# Altium PCB Rackmount_DSP.PcbDoc (part 10 of 24)
Units mil, origin at the board's own origin, x right, y up, seen from the top; angles counter-clockwise.
Board outline 10629.92 x 8267.72 mil, 4 copper layers (Top Layer, Mid Layer 1, Mid Layer 2, Bottom Layer), stack 36.2 mil thick; 4500 components, 1565 nets, 9765 pads, 3289 vias.
Unrouted connection lines stored in the file: 1.
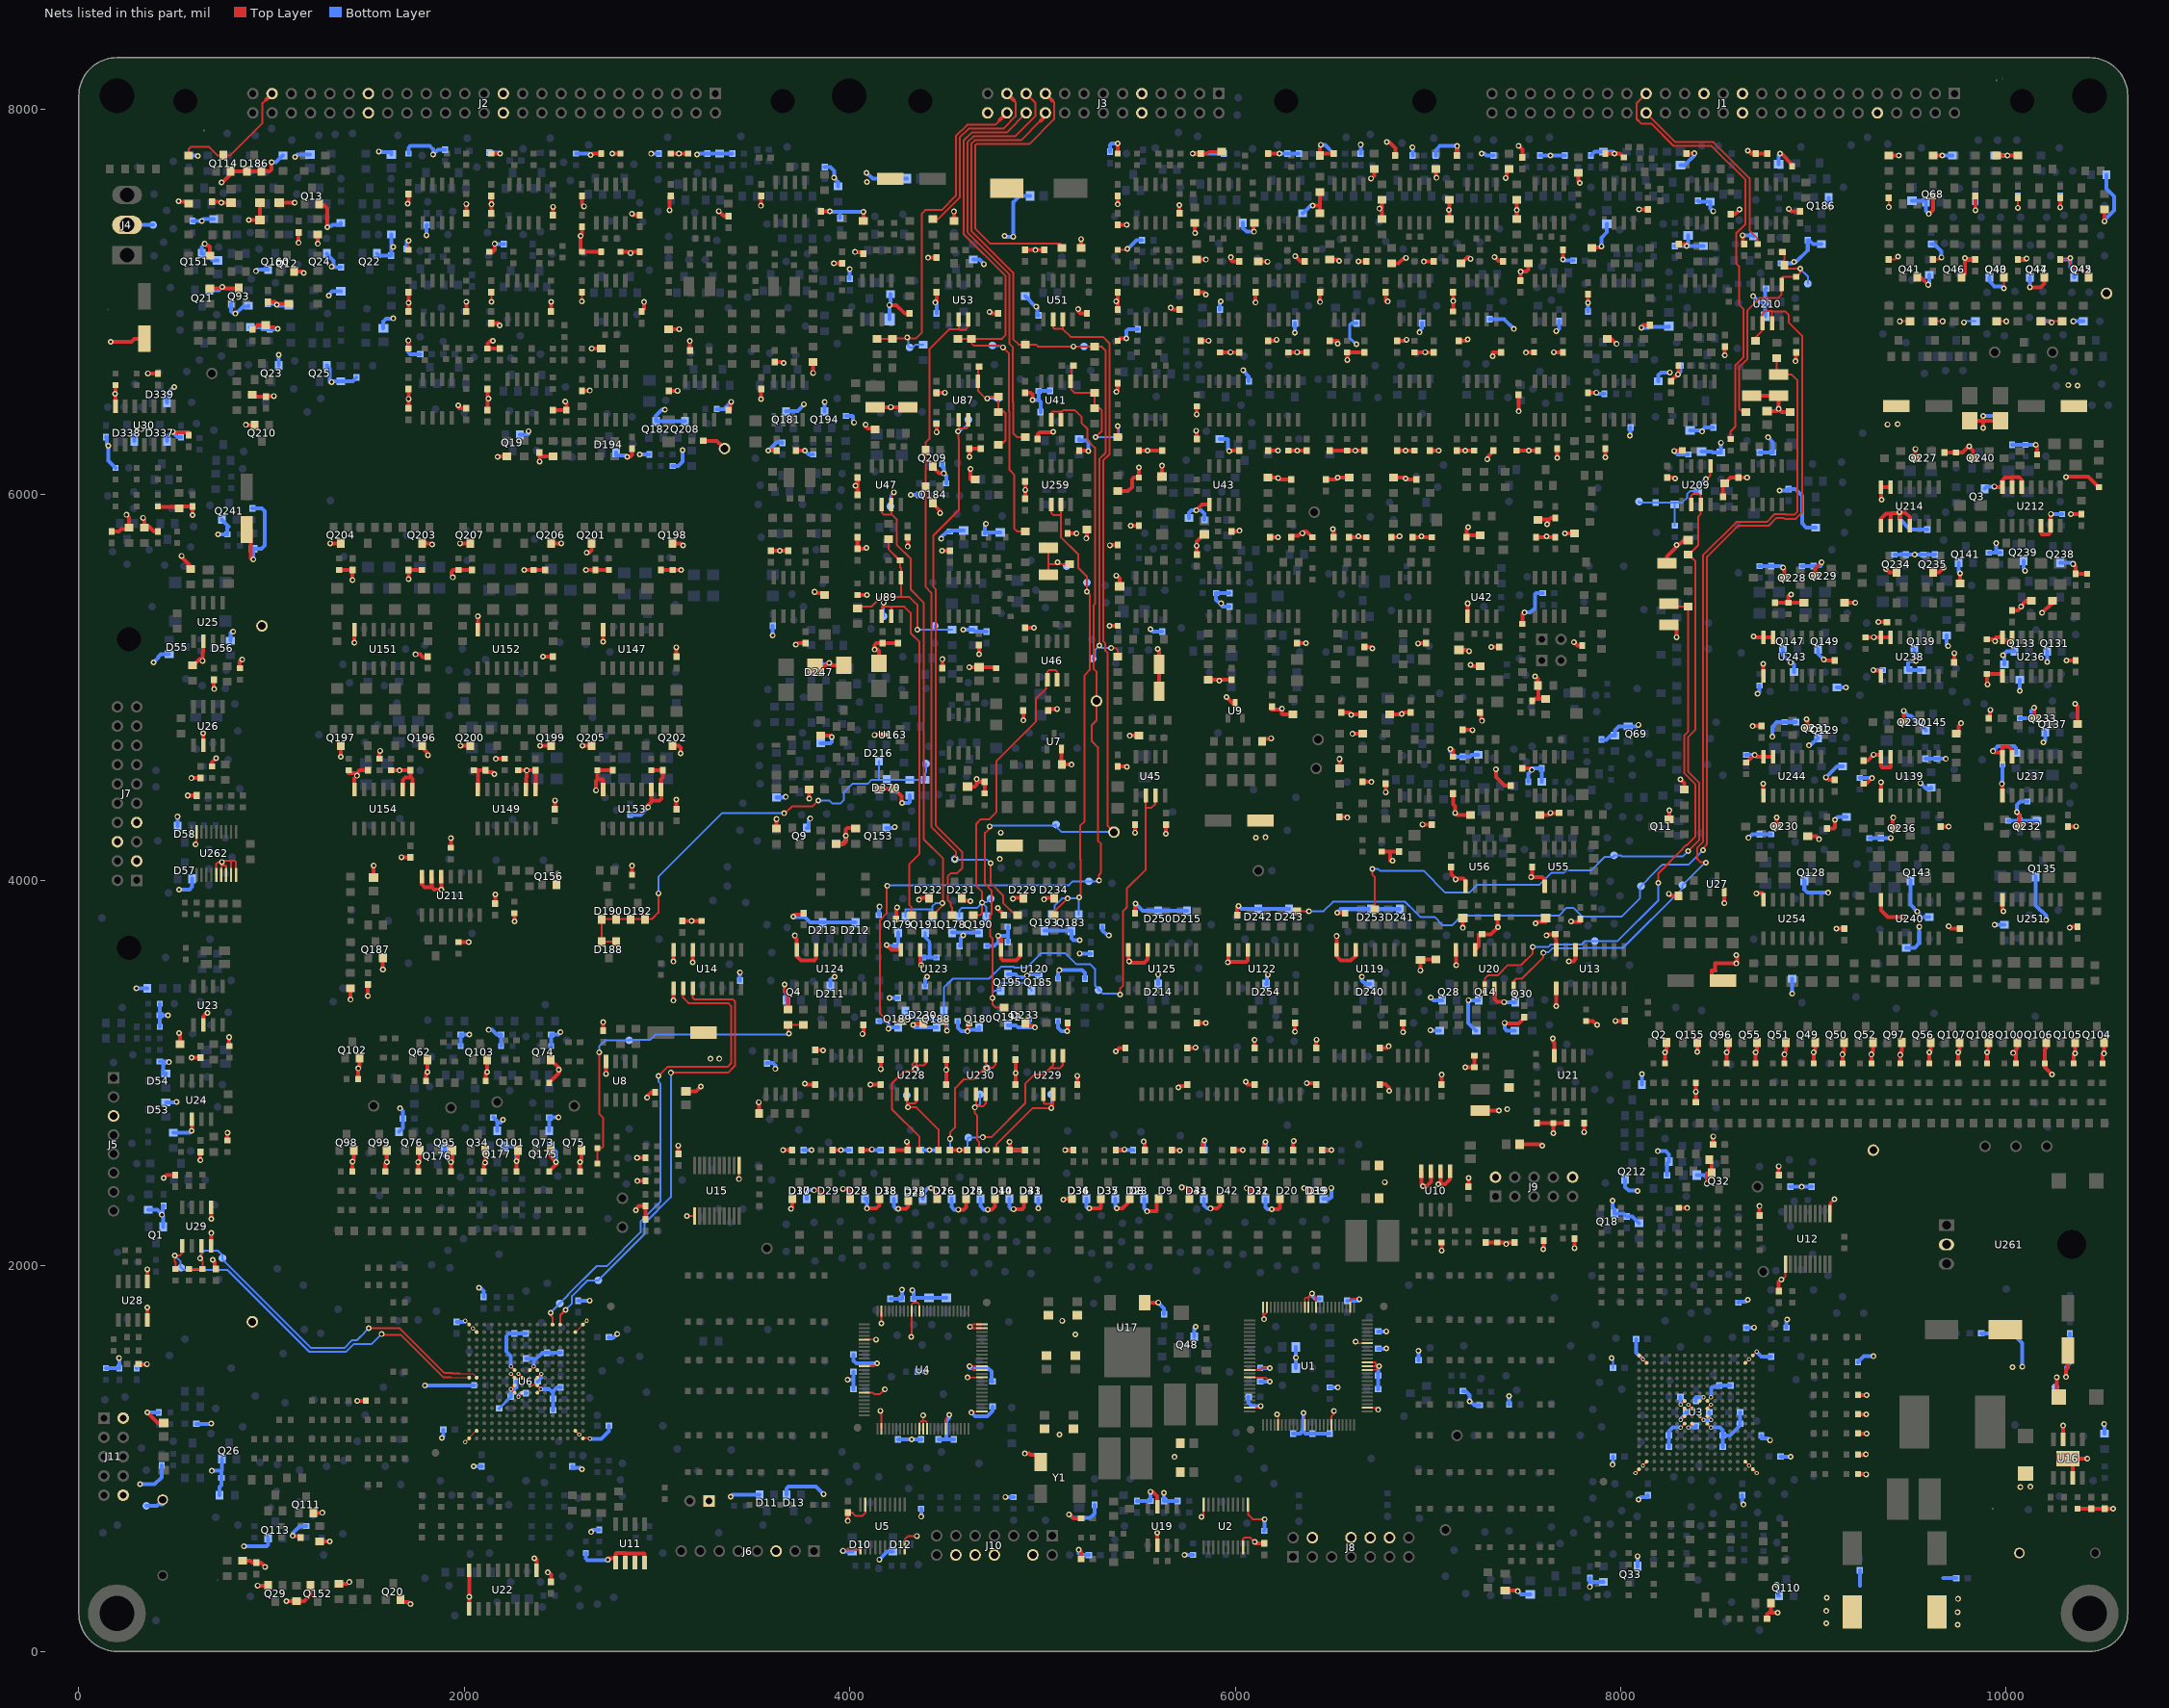
[diagram p12: the nets of this part, all layers, seen from the top]

## Via types
v1: diameter 30, hole 16, Top Layer to Bottom Layer, 3143 vias
v2: diameter 22, hole 12, Top Layer to Bottom Layer, 146 vias

## Nets (pads, with @x,y where several pads share a name; then routed paths per layer and width w, separated by ;. In a path a pad name is that pad's centre, name@x,y a point inside that pad or via, vN(x,y) a via of type N, cw(c..) or ccw(c..) an arc to the next point about the centre after c; other vN are vias at no path point) (continued)
GND: (continued)
  Bottom Layer w20: R863.2@140,1470 C360.2@210,1470 210,1521.07 v1(208.79,1522.28) ; C435.2@140,6300 146,6300 146,6261.57 v1(153.21,6254.36) 153.21,6176.79 R1493.2@190,6140 ; J4.2@250,7400 TP1675.1@385,7400 ; D338.1@287.5,6278.5 287.5,6317.61 310.71,6340.82 v1(324.1,6340.82) ; v1(298.45,3440) R2719.2@355,3440 ; C441.2@300,1470 320,1490 v1(353.36,1490) ; v1(317.24,867.09) 393.59,867.09 430,903.5 C354.2@430,965 ; TP1672.1@350,755 405,755 411.85,761.85 435,761.85 C1143.1@435,786.85 ; v1(355.17,1240) C353.2@415,1240 ; R1378.2@360,2290 406.77,2290 431.11,2265.66 v1(431.11,2264.84) ; v1(387.19,5130.05) 411.94,5154.8 411.94,5159.44 425,5172.5 D55.1@468.5,5172.5 ; C432.2@420,3060 449.28,3060 ; R870.2@420,3240 C431.2@420,3300 ; R867.2@420,3360 C431.2@420,3300 ; Q1.2@437.5,2201.5 437.5,2258.46 v1(431.11,2264.84) ; C423.1@440,2310 434,2310 434,2267.73 v1(431.11,2264.84) ; D53.1@451.5,2847.5 504.12,2847.5 v1(506.48,2849.86) ; D54.1@451.5,2997.5 438,2997.5 438,3042 449.28,3053.28 449.28,3060 ; D337.1@457.5,6278.5 457.5,6301.57 v1@483.69,6327.76 ; D339.1@457.5,6478.5 457.5,6525.22 491.24,6558.97 v1(495.09,6558.97) ; v1(463.04,3300) C431.2@420,3300 ; v1(467.34,3056.64) 463.98,3060 449.28,3060 ; v1(486.91,6328.02) 486.91,6327.76 v1@483.69,6327.76 ; R680.2@490,2690 574.71,2690 v1(584.64,2699.94) ; v1(511.57,4330.25) 512.5,4329.33 D58.1@512.5,4281.5 ; v1(519.49,3951.94) 573.66,3951.94 587.5,3965.78 D57.1@587.5,4008.5 ; C433.2@530,6300 530,6299.59 511.85,6299.59 v1@483.69,6327.76 ; C1035.1@570,7760 615.8,7760 v1(617.5,7758.3) ; C1043.1@590,7420 v1(638.44,7420) 648.44,7430 R2281.2@700,7430 ; C1028.1@610,1180 683.87,1180 v1(686.28,1182.41) ; v1(652.97,7302.55) 637.5,7287.08 Q151.2@637.5,7251.5 657.29,7251.5 693.79,7215 C1.2@720,7215 ; Q21.2@677.5,7061.5 726.19,7061.5 v1(743.76,7079.07) ; v1(688.98,936.43) 688.72,936.43 690.72,938.42 740,938.42 740,936 ; v1(722.76,5795) R2725.1@770,5795 770,5830 770.78,5830 776.64,5835.86 742.5,5870 Q241.2@742.5,5873.5 ; R1357.2@730,810 730,852.5 740,862.5 C358.1@740,900 740,936 ; Q26.2@742.5,998.5 742.68,998.32 742.68,938.68 740,936 ; D56.1@786.5,5242.5 786.5,5282.5 794,5290 v1(800.51,5290) ; C430.1@790,6990 790,6951.7 801.7,6940 810.86,6940 v1(811.63,6940) 814.3,6940 851.35,6977.06 880,6977.06 R660.1@880,6980 ; v1(856.2,544.54) 973.27,544.54 982.5,553.76 Q113.2@982.5,588.5 ; R1375.2@890,6870 941.93,6870 951.93,6860 C419.1@990,6860 1026,6860 1026.67,6860.67 v1(1031.15,6860.67) ; C1178.1@900,5930 948.73,5930 964.14,5914.59 964.14,5736.75 947.39,5720 R2732.1@905,5720 905,5665.31 v1(905.6,5664.72) ; v1(918.59,7160.08) 918.59,7160.73 926.36,7168.5 Q160.2@982.5,7168.5 ; C1101.1@980,6990 1016,6990 1019.6,6986.4 v1(1026.22,6986.4) 1032.62,6980 R2506.1@1090,6980 ; v1(1000.21,7724.96) 1022.46,7724.96 1057.5,7760 R2504.1@1060,7760 ; Q23.2@1037.5,6671.5 v1(1037.5,6726.7) ; v1(1108.88,599.32) 1108.88,611.46 1147.42,650 R2099.1@1180,650 ; v1(1121.1,7752.76) 1133.34,7765 C821.2@1200,7765 ; Q25.2@1287.5,6671.5 1287.5,6668 1300.73,6654.77 1300.73,6585.24 v1(1312.25,6585.24) 1317.01,6590 R1377.2@1360,6590 1421.5,6590 1440,6608.5 C421.1@1440,6610 ; Q24.2@1287.5,7251.5 1287.5,7248 1321.64,7213.86 1321.64,7194.07 v1(1310.65,7183.08) 1313.74,7180 C420.1@1360,7180 ; v1(1288.76,7387.58) 1296.18,7395 1312.5,7395 1317.5,7400 1360,7400 R1376.2@1360,7410 ; v1(1296.56,7034.14) 1296.56,7036.56 1315,7055 C820.2@1360,7055 ; Q22.2@1547.5,7251.5 1559,7240 C418.1@1620,7240 v1@1620,7285.9 ; v1(1555.95,7781.25) 1571.25,7781.25 1575,7777.5 1620,7777.5 C819.2@1620,7765 ; C822.2@1580,6865 1580,6899.57 1594.09,6913.66 1630.88,6913.66 v1(1630.88,6914.99) ; R1374.2@1620,7350 v1@1620,7285.9 ; v1(1630.88,7285.9) v1@1620,7285.9 ; R2556.2@1660,2695 1680,2715 C1117.1@1680,2765 1680,2803.57 v1(1666.56,2817.01) ; C1212.2@1700,7275 1701,7275 1701,7318.69 v1(1711.84,7318.69) ; v1(1709.47,6800.28) 1709.24,6800.28 1709.24,6740.41 1719.66,6730 C1209.2@1770,6730 ; R824.2@1710,7770 1710,7799.25 1719.87,7809.11 1822.02,7809.11 1837.27,7793.86 v1(1837.27,7764.71) 1862.57,7790 C1215.2@1900,7790 ; v1(1795.01,1380) R874.2@2050,1380 ; v1(1802.8,7346.68) 1802.8,7397.8 C367.1@1805,7400 ; v1(1884.11,1107.83) 1890,1113.71 C285.2@1890,1150 ; Q176.2@1897.5,2611.5 1897.5,2570.91 v1(1930,2538.41) ; C287.2@1960,1710 2000.08,1710 v2(2005.04,1714.96) ; R2610.2@1980,3140 C1140.2@1980,3200 v1(2025.56,3200) ; v1(2048.57,960) C269.2@2090,960 ; v1(2076.11,1886.21) 2076.11,1885.64 2084.12,1885.64 2084.12,1883.67 2085.95,1883.67 2100,1869.62 C274.2@2100,1840 ; v1(2126.73,3223.96) 2143.35,3223.96 2167.3,3200 C1141.2@2190,3200 R2611.2@2190,3140 ; C1236.2@2130,7775 2180,7775 v1(2185,7770) ; C1118.1@2150,2770 2170,2750 2170,2743.72 ; v1(2157.29,7302.5) 2159.79,7300 C1233.2@2205,7300 ; R2557.2@2170,2700 2170,2743.72 ; v1(2201.32,2757.46) 2187.58,2743.72 2170,2743.72 ; Q177.2@2207.5,2621.5 2255.49,2621.5 2270,2606.99 v1(2270,2542.61) ; C279.2@2240,1320 2240,1359.37 v2(2241.26,1360.63) 2260.07,1360.63 2270,1370.56 C266.2@2270,1400 ; v2(2241.26,1478.74) 2241.26,1531.47 2216.9,1555.83 2216.9,1635.31 2233.27,1651.68 2234.94,1650 C271.2@2260,1650 C273.2@2320,1650 ; v2(2280.63,1321.26) 2280.63,1328.01 2292.62,1340 C244.2@2320,1340 ; Q19.2@2287.5,6311.5 2327.5,6311.5 2332.82,6316.82 v1(2332.82,6330.31) ; C270.2@2320,1520 2356,1520 2360.22,1515.78 ; v2(2360.22,1478.4) 2360.22,1515.78 ; C245.2@2380,1400 2398.74,1418.74 v2(2398.74,1439.37) ; v2(2397.55,1360.63) 2439.98,1360.63 2460,1340.61 ; R2555.2@2440,2700 C1116.1@2440,2770 v1(2488.61,2770) ; Q175.2@2447.5,2621.5 2474.9,2594.1 v1(2474.9,2538.58) ; R2609.2@2450,3140 C1139.2@2450,3200 2486.73,3200 v1(2499,3212.27) ; C239.2@2460,1250 C280.2@2460,1310 2460,1340.61 ; C250.2@2500,1370 2480.6,1370 2460,1349.4 2460,1340.61 ; C307.2@2500,1550 C306.2@2430,1550 2404.73,1550 2370.51,1515.78 2360.22,1515.78 ; C268.2@2560,960 2560,952.5 2602.86,952.5 v1(2610.87,944.49) ; R2340.2@2580,7770 2648.33,7770 v1(2655.35,7762.98) ; C286.2@2590,1820 v1(2650.74,1820) ; R751.2@2630,510 2630,481.84 2637.85,473.99 2744.28,473.99 v1(2744.28,474.88) ; v2(2652.36,1104.23) 2652.36,1102.81 2710.43,1102.81 2750,1142.39 C284.2@2750,1170 ; v1(2658.41,618.96) 2658.41,624.4 2664,630 C243.2@2700,630 ; C293.2@2750,1630 2750,1627.49 2773.1,1627.49 2791.52,1645.92 v1(2793.53,1645.92) ; D194.1@2787.5,6218.5 2787.5,6205 2836.39,6205 v1(2844.37,6197.02) ; R2645.2@2860,4340 2913.98,4340 v1(2953.2,4379.22) ; v1(2910.18,6210) C1150.1@2960,6210 ; v1(2968.98,7769.14) 2968.98,7770 C368.1@3010,7770 ; v1(3040.96,6442.26) 3024.75,6442.26 2992.85,6410.35 2995,6408.2 Q182.3@2995,6381.5 Q208.3@3145,6381.5 ; R2623.1@3080,6150 3110.4,6150 3132.24,6171.84 v1(3132.24,6231.31) ; v1(3207.34,7765.35) 3212,7770 C362.1@3260,7770 R1672.2@3325,7770 C1248.2@3390,7770 ; R2584.2@3310,6445 3346.89,6445 v1(3384.78,6482.9) ; v1(3382.61,801.86) 3392.25,811.5 D11.1@3532.5,811.5 ; C633.2@3430,3480 3430,3521.91 v1(3430.61,3522.53) ; C631.2@3570,3050 3570,3052.07 3599.89,3052.07 3613.01,3038.95 v1(3613.01,3021.5) ; v1(3576.97,6230) 3618.91,6271.94 3650,6271.94 C1148.1@3650,6270 ; v1(3600,5270.97) C422.1@3600,5320 ; R1101.2@3620,4430 3666.68,4430 3668.59,4431.91 v1(3667.71,4432.78) ; v1(3661.87,3460.26) 3661.87,3423.2 3669.37,3415.7 3669.37,3402.41 3671.53,3400.25 3671.53,3383.48 3672.5,3383.48 Q4.2@3672.5,3378.5 ; Q181.3@3670,6431.5 3670,6434.25 3729.63,6434.25 3761.77,6466.39 v1(3761.77,6470) ; D13.1@3672.5,811.5 3672.5,844.81 3682.69,855 3824.53,855 v1(3863.58,815.95) ; v1(3706.5,3811.4) 3709.59,3808.31 3766.79,3808.31 3793.59,3781.5 D213.3@3860,3781.5 D212.3@4030,3781.5 ; C313.2@3760,2600 v1(3801.21,2600) ; v1(3766.09,6230) 3786.09,6210 R2622.1@3810,6210 ; D17.1@3777.5,2348.5 3777.5,2380.75 3789.14,2392.39 v1(3815.09,2392.39) ; Q9.2@3777.5,4271.5 3787.5,4271.5 3787.5,4315.18 3792.56,4320.24 v1(3795,4320.24) ; D247.3@3840,5121.5 3880,5121.5 3886.79,5128.29 v1(3892.89,5128.29) ; R1840.2@3850,4710 3897.93,4710 3906.47,4718.53 v1(3906.47,4743.52) ; Q194.3@3870,6431.5 v1(3870,6481.77) ; C546.1@3870,7700 3898.74,7700 3917.86,7680.87 v1(3917.86,7646.08) 3940,7623.94 R1614.1@3940,7600 ; v1(3896.68,7470) 3896.68,7468.66 3896.98,7468.36 3950,7468.36 ; D211.3@3900,3451.5 3900.11,3451.5 3900.11,3484.14 3916.27,3500.3 v1(3921.34,3500.3) ; R2415.2@3930,4190 3930,4188.48 3962.21,4188.48 3979.68,4205.94 v1(3979.68,4230.89) ; C1245.2@3950,7435 3950,7468.36 ; v1(3953.87,2600) C317.2@4000,2600 ; v1(3964.83,521.14) 3964.83,526.84 3958.87,520.88 3962.24,517.5 D10.1@4013.5,517.5 ; R2590.2@3980,6410 4012.58,6410 4016.5,6406.08 4016.5,6380.86 v1(4022.28,6375.08) ; v1(3987.95,1409.55) 4020,1409.55 ; C545.1@4000,7120 v1(4000,7170.69) ; C255.2@4020,1360 4020,1409.55 ; C225.2@4020,1450 4020,1409.55 ; C249.2@4020,1540 4020,1507.83 4033.34,1494.5 v1(4140.75,1494.5) ; v1(4070,7467.71) 4070,7468.36 3950,7468.36 ; D27.1@4077.5,2348.5 4087.5,2348.5 4087.5,2305 4089.05,2303.45 v1(4089.05,2297.53) ; v1(4086.58,7670.97) 4117.55,7640 C730.1@4295,7640 ; v1(4114.44,2603.91) 4118.35,2600 C319.2@4160,2600 ; R2585.2@4150,3270 4185.95,3270 4199.93,3256.03 v1(4199.93,3230.64) 4207.79,3238.5 Q189.3@4250,3238.5 ; R2629.1@4150,3820 4150,3855 4150.88,3855.88 4150.88,3859.45 v1(4154.54,3863.11) ; v1(4152.57,476.43) 4151.59,476.43 4152.8,476.43 4152.8,476.48 4193.81,517.5 D12.1@4223.5,517.5 ; Q153.2@4187.5,4271.5 4227.46,4271.5 v1(4232.52,4276.55) ; v1(4191,3664.61) 4195.61,3660 C1151.1@4240,3660 4250,3670 Q179.3@4250,3728.5 ; R1697.1@4205,6910 v1(4205,6984.82) 4210,6989.82 R1613.1@4210,7040 ; v1(4206.45,3390) C1156.1@4250,3390 ; C29.2@4210,1830 C37.2@4270,1830 v1(4270,1876.02) ; D38.1@4227.5,2348.5 4227.5,2307.34 4238.78,2296.07 v1(4251.13,2296.07) ; C267.2@4250,1100 4320.01,1100 v1(4320.39,1100.38) 4333.62,1100.38 4334,1100 C248.2@4370,1100 ; v1(4271.2,4400.63) 4305.42,4400.63 4310,4405.2 R2323.2@4310,4440 ; v1(4315.77,6000) C1152.1@4360,6000 ; v1(4324.63,1873.74) 4330,1868.37 R626.2@4330,1830 4335,1835 C340.2@4410,1835 C339.2@4500,1835 ; v1(4328.14,3249.92) 4339.56,3238.5 Q188.3@4450,3238.5 ; R782.1@4350,1450 v1(4396.32,1450) ; v1(4370,699.14) R628.2@4370,740 ; C759.2@4370,2600 v1(4412.94,2600) C321.1@4460,2600 ; D22.1@4377.5,2348.5 4377.5,2374.27 4406.97,2403.75 v1(4421.44,2403.75) ; R2587.2@4380,3600 R2628.1@4450,3600 ; R2627.1@4390,3450 4390,3489.43 v1(4400.77,3500.2) ; v1(4442.78,6997.53) 4450,6990.31 C1061.1@4450,6940 ; v1(4450,6325.48) C1054.1@4450,6370 ; C1057.1@4450,6530 v1(4492.83,6530) ; C253.2@4460,1100 4496,1100 4499.83,1103.83 ; v1(4474.44,5772.64) 4474.44,5779.64 4504.8,5810 R1775.2@4520,5810 4525,5815 C810.2@4590,5815 ; R2583.2@4480,6160 4480,6145 4487.31,6137.69 v1(4487.31,6111.02) 4500,6098.33 R2626.1@4500,6060 ; v1(4516.43,1227.08) 4516.43,1210.78 4499.83,1194.18 4499.83,1103.83 ; D26.1@4527.5,2348.5 4527.5,2305.95 4541.41,2292.04 v1(4562.45,2292.04) ; Q178.3@4530,3728.5 4574.32,3728.5 v1(4587.9,3714.92) ; C28.2@4540,1100 4504,1100 4500.17,1103.83 4499.83,1103.83 ; R2621.1@4560,3270 4560,3234.63 4577.93,3216.7 v1(4610.23,3216.7) 4618.54,3225 4670,3225 Q180.3@4670,3238.5 ; C1155.1@4570,3660 4576,3660 4576,3703.01 v1(4587.9,3714.92) ; v1(4588.02,5300) R1696.1@4640,5300 4650,5290 C511.2@4710,5290 ; v1(4621.66,1479.63) 4621.66,1470 4715.08,1470 4734.48,1450.61 4734.48,1400 C36.2@4740,1400 ; v1(4630.48,1238.29) 4631.42,1238.29 4649.44,1220.28 4713.67,1220.28 4740,1246.61 C27.2@4740,1270 ; R2598.2@4640,7220 4640,7221.17 4672.11,7221.17 v1(4696.32,7196.96) ; C328.1@4670,2600 4710.1,2600 v1(4711.81,2601.71) ; Q190.3@4670,3728.5 4587.9,3728.5 v1(4587.9,3714.92) ; D15.1@4677.5,2348.5 4677.5,2310.72 4696.18,2292.04 v1(4715.55,2292.04) ; v1(4706.32,5850.18) 4700,5843.86 R1778.2@4700,5800 4705,5805 C807.2@4780,5805 ; R2586.2@4710,3660 4748.94,3660 4769.6,3680.66 v1(4769.6,3711.63) 4815.88,3711.63 4820,3715.75 ; v1(4802.52,7342.91) 4805.95,7339.48 v1(4848.1,7339.48) 4848.1,7516.89 4881.21,7550 C727.2@4935,7550 ; v1(4807.11,800.72) 4813.28,800.72 4814,800 R717.2@4850,800 ; Q192.3@4820,3248.5 4860.4,3248.5 4872.4,3236.5 4932.59,3236.5 ; Q195.3@4820,3511.5 4860,3511.5 4873.63,3497.87 4911.27,3497.87 v1(4919.55,3506.15) 4924.9,3511.5 Q185.3@4980,3511.5 ; C1149.1@4820,3680 4820,3715.75 ; R2589.2@4820,3760 4820,3715.75 ; D40.1@4827.5,2348.5 4827.5,2305 4837.9,2294.6 v1(4849.6,2294.6) ; v1(4829.18,2643.29) 4830,2642.47 C324.1@4830,2600 C219.2@4910,2600 ; R2601.2@4910,7030 4963.48,6976.52 v1(4966.7,6976.52) 4974,6969.22 4974,6930 C1060.1@4980,6930 ; R2588.2@4930,3280 4930,3239.1 4932.59,3236.5 ; v1(4947.76,6492.24) 4980,6492.24 ; v1(4960.48,3236.5) 4932.59,3236.5 ; v1(4977.5,2299) D33.1@4977.5,2348.5 ; C384.1@4990,6430 4990,6482.24 4980,6492.24 ; Q193.3@5010,3738.5 Q183.3@5150,3738.5 5150,3700.58 5160.68,3689.91 v1(5192.53,3689.91) ; C1058.1@5040,6540 R2375.1@4980,6540 4980,6492.24 ; R2591.2@5080,3270 5080,3234.06 5096.87,3217.18 v1(5128.33,3217.18) ; R2624.1@5080,3490 5080,3526.79 v1(5086.94,3533.73) 5205.25,3533.73 5220,3518.98 C1153.1@5220,3490 ; v1(5116.53,2600) C1074.2@5160,2600 ; v1(5136.5,710.5) 5137.99,710.5 5157.15,691.33 5245.75,691.33 5269.62,715.21 5269.62,759.62 C312.2@5270,760 ; v1(5188.22,526.73) 5188.22,508.28 5196.51,500 C514.2@5240,500 ; R2597.2@5190,6290 5190,6282.48 5229.68,6282.48 5237.94,6274.22 5237.94,6226.85 v1(5237.5,6226.85) ; v1(5192.53,3620.67) 5192.53,3620 C1154.1@5250,3620 ; D34.1@5227.5,2348.5 5227.5,2305 5234.39,2298.11 v1(5242.89,2298.11) ; R2625.1@5310,3760 5310,3740.3 5336.38,3713.92 v1(5344.17,3713.92) ; C1200.2@5350,7780 5350,7813.26 5348.77,7814.49 5356.79,7822.52 v1(5390,7822.52) ; D35.1@5377.5,2348.5 5377.5,2305 5384.2,2298.3 v1(5385.54,2298.3) ; C4.2@5380,2600 5421.38,2600 v1(5425.29,2603.91) 5429.2,2600 C5.2@5470,2600 ; v1(5434.13,6810.96) 5435.25,6812.08 5435.25,6851.31 5443.93,6860 C1206.2@5495,6860 ; v1(5439.31,7275.29) 5442.72,7275.29 5487.44,7320 C1203.2@5515,7320 ; v1(5481.6,3878.62) 5518.72,3841.5 D250.3@5600,3841.5 D215.3@5750,3841.5 ; C325.1@5490,780 R760.2@5560,780 v1(5560,828.2) ; D8.1@5527.5,2348.5 5527.5,2297.71 v1(5542.67,2282.55) ; v1(5559.12,5303.38) 5572.5,5290 C968.2@5620,5290 ; v1(5599.51,3511.33) 5600,3510.83 D214.3@5600,3461.5 ; v1(5600.67,1810.1) 5600.67,1808.75 5630,1779.42 C297.2@5630,1750 ; v1(5630,822.53) C498.2@5630,780 C329.1@5700,780 ; v1(5736.07,500) R20.2@5780,500 ; R1679.1@5760,5880 5760,5908.37 5771.62,5920 v1(5798.13,5920) 5821.66,5920 5840,5901.66 C791.2@5840,5870 ; v1@5778.66,7770 C1099.1@5820,7770 5839.42,7770 5839.42,7770.17 5906.4,7770.17 5906.57,7770 C1093.1@5940,7770 ; Q48.2@5787.5,1631.5 5787.5,1676.67 v1(5794.87,1684.04) ; D31.1@5837.5,2348.5 5837.5,2314.38 5854.68,2297.2 v1(5870.84,2297.2) ; C1077.1@5840,2600 v1(5840,2650.43) ; R1474.2@5920,6290 5957.66,6290 5961.47,6286.19 5961.47,6239.31 5962.5,6238.28 5962.5,6232.64 v1(5968.46,6226.68) ; C1073.2@5920,6960 5920,7000.96 5922.31,7003.27 v1(5924.26,7003.27) ; C651.2@5970,5420 5934,5420 5925.91,5428.09 v1(5925.91,5436.52) 5918.48,5436.52 5900,5455 R2287.2@5900,5490 C548.2@5970,5490 ; v1(6017.06,3866.24) 6031.8,3851.5 D242.3@6120,3851.5 D243.3@6280,3851.5 ; R2602.2@6040,7410 6040,7383.59 6058.91,7364.69 v1(6097.61,7364.69) ; v1(6040.93,6645.93) 6040.93,6643.27 6070,6614.2 C1067.2@6070,6590 ; C23.2@6070,1320 6067.43,1320 6067.43,1291.83 6086.46,1272.79 v1(6130.94,1272.79) ; C34.2@6130,1400 v1(6178.83,1400) ; R17.2@6130,1470 v1(6179.34,1470) ; R25.2@6150,625 6152.71,627.71 v1(6152.71,684.99) ; v1(6155.94,2643.45) 6160,2639.38 C11.1@6160,2600 ; D32.1@6157.5,2348.5 6157.5,2303.51 6167.84,2293.17 v1(6188.77,2293.17) ; D254.3@6160,3461.5 6164.3,3461.5 6164.3,3505 v1(6169.66,3510.36) ; v1(6228.95,7770) C1098.1@6270,7770 C1092.1@6330,7770 ; C33.2@6300,1130 6336,1130 6347.53,1141.53 6352.47,1141.53 ; v1(6308.55,6842.03) 6308.55,6837.14 6312.73,6841.32 6310,6844.05 C1072.2@6310,6890 ; C21.2@6315,1470 v1(6315,1524.22) C20.2@6315,1580 ; R2595.2@6350,7460 6352.5,7460 6392.5,7500 v1(6401.53,7500) ; v1(6353.99,1236.55) 6353.99,1141.53 6352.47,1141.53 ; v1(6397.65,1856.98) 6397.65,1845.03 6413.43,1829.25 6440,1829.25 C35.2@6440,1830 ; v1(6443.78,7816.13) 6465.37,7816.13 6510,7771.5 C1097.1@6510,7770 ; C1076.1@6450,2600 v1(6498.79,2600) ; D39.1@6457.5,2348.5 6489.79,2348.5 6497.9,2356.6 v1(6497.9,2404.51) ; C32.2@6490,1130 C22.2@6400,1130 6364,1130 6352.47,1141.53 ; R605.2@6490,1370 v1(6531.99,1370) ; v1(6528.21,3832.43) 6546.37,3850.59 D253.3@6704.31,3850.59 D241.3@6854.31,3850.59 ; C25.2@6580,1820 6636.54,1820 6643.79,1827.25 v1(6644.25,1827.25) ; C1091.1@6650,7770 v1(6650,7816.78) ; v1(6657.09,3500.2) 6657.09,3480.44 6676.03,3461.5 D240.3@6700,3461.5 ; C220.2@6740,1360 C31.2@6740,1430 6740,1474.21 v1(6745.74,1479.95) ; C30.2@6740,1570 6777.5,1570 6779.43,1571.93 v1(6784.2,1571.93) ; C24.2@6740,1660 v1(6784.2,1660) ; v1(6919.32,7802.5) 6920,7801.82 C1096.1@6920,7760 ; C507.2@6950,1510 v1(6950,1558.86) ; v1(6956.2,6842.7) 6956.2,6850.56 6968.84,6863.21 6968.84,6890 C1070.2@6970,6890 ; v1(7012.25,3223.18) 7015.44,3220 R1692.2@7060,3220 ; v1(7014.17,3392.93) 7028.59,3378.5 Q28.2@7072.5,3378.5 ; C1090.1@7040,7760 7040,7788.2 7060.91,7809.11 v1(7150,7809.11) C1095.1@7150,7760 ; v1(7115.9,4681.54) 7115.9,4668.1 7144,4640 C793.2@7180,4640 7216,4640 7217.5,4641.5 7217.5,4641.69 7225.81,4650 R1681.1@7260,4650 ; C513.2@7180,1350 7195.84,1350 7215.78,1330.06 v1(7215.78,1297) 7217.96,1299.18 7240.14,1277 C516.2@7268.57,1277 ; R1690.2@7250,3220 7247.5,3220 7207.13,3260.37 7207.13,3340.82 7207.7,3340.82 7207.7,3378.5 v1(7209.53,3378.5) Q14.2@7262.5,3378.5 ; v1(7278.49,7770.9) 7293.1,7770.9 7304,7760 C1089.1@7340,7760 ; C1069.2@7320,6910 7395.15,6910 v1(7445.05,6860.11) ; v1(7394.12,3368.5) Q30.2@7452.5,3368.5 ; v1(7396.9,3260.85) 7396.9,3231.41 7408.31,3220 R1691.2@7450,3220 ; R876.2@7420,1280 v1(7420,1324.26) ; v1(7465.24,312.14) 7482.38,295 C818.2@7530,295 ; v1(7500,5389.34) 7530.64,5389.34 7553.99,5412.7 7553.99,5484.32 7559.67,5490 C1051.2@7595,5490 ; C541.1@7520,4510 7520,4553.96 v1(7538.49,4572.45) 7546.04,4580 C1050.2@7590,4580 R1635.1@7590,4510 ; C1094.1@7580,7760 v1(7635.82,7760) C1088.1@7710,7760 ; v1(7665,6850) 7667.5,6850 7680,6862.5 C1068.2@7680,6900 ; v1(7700,7220.35) 7705.35,7215 C1239.2@7755,7215 ; C375.1@7830,6950 v1(7830,6995.46) ; v1(7839,334.48) 7839,339 v1@7840,340 ; C415.1@7840,380 v1@7840,340 ; C1221.2@7845,7760 7865,7780 R2559.2@7910,7780 7956.6,7780 v1(7966.6,7770) ; v1(7873.44,6530) 7878.44,6525 C1242.2@7915,6525 ; v1(7899.41,7289.44) 7899.41,7333.41 7928.5,7362.5 C787.2@7928.5,7405 ; C436.1@7900,4730 7900,4727.88 7925.5,4727.88 7947.61,4750 R1354.1@7970,4750 7970,4778.09 7989.41,4797.5 Q69.2@8038.5,4797.5 8082,4797.5 8091.07,4806.57 v1(8091.07,4807.09) ; R1371.2@7910,360 7860,360 v1@7840,340 ; v1(7957.61,968.97) 7960,968.97 C238.2@7960,1010 ; v1(7957.6,2338.71) 7957.6,2304.59 7956.97,2303.97 7967.5,2293.44 Q18.2@7967.5,2271.5 8013.5,2271.5 C374.1@8030,2255 8060,2255 R1358.1@8095,2220 ; Q212.2@8022.5,2448.5 8022.5,2409.01 8041.39,2390.12 8086.66,2390.12 v1(8086.66,2388.47) ; v1(8047.3,6307.44) 8050,6310.15 C660.2@8050,6350 ; C261.2@8080,1620 8080,1550 v2(8114.41,1515.59) ; Q33.2@8087.5,441.5 v1(8087.5,493.57) ; v1(8092,788.06) 8104,800.05 8140,800.05 C265.2@8140,810 ; v1(8107.74,6867.37) 8142.74,6867.37 8148.75,6873.38 8148.75,6870.61 8250,6870.61 C785.2@8250,6875 ; R74.1@8110,2940 v1(8110,2995.84) ; v1(8192,2594.42) 8234.61,2594.42 8250,2579.03 R71.1@8250,2540 8240,2530 C1159.1@8240,2470 ; R2558.2@8195,6590 8195,6620.96 8209.24,6635.2 v1(8253.88,6635.2) ; C231.2@8250,1060 C257.2@8250,1120 8250,1142.27 8268.99,1161.26 v2(8311.26,1161.26) ; v1(8277.18,6227.91) 8295.09,6210 R2230.1@8350,6210 ; C1227.2@8280,7290 8340.93,7290 v1(8342.5,7291.57) ; v1(8297.05,6625) 8310,6637.95 C1218.2@8310,6670 ; C281.2@8310,1320 8310,1281.82 v2(8311.26,1280.56) ; C1176.2@8310,7710 8330.64,7710 8381.17,7760.52 v1(8381.17,7771.82) ; v2(8311.26,1200.63) 8311.26,1206.96 8340,1235.7 C256.2@8340,1240 ; C784.2@8350,7345 8350,7299.07 v1(8342.5,7291.57) ; v2(8350.63,1161.26) 8351.87,1162.5 8390,1162.5 C263.2@8390,1170 ; C786.2@8360,6335 8415.67,6335 v1(8422.19,6328.48) 8422.19,6334.87 8437.32,6350 C674.2@8480,6350 ; C259.2@8390,1300 8390,1318.74 v2(8429.37,1318.74) ; C817.2@8395,2470 8432.02,2470 8445.63,2456.4 v1(8445.63,2426.87) ; C1224.2@8400,7525 8405,7520 R1315.2@8465,7520 8465,7486.72 v1(8480.12,7471.6) ; C801.2@8420,6225 8472.5,6225 8477.5,6220 R1686.1@8520,6220 v1(8520,6270.4) ; v2(8429.37,1200.63) v2@8460,1200.63 ; R1317.2@8430,7290 8379.07,7290 8377.5,7291.57 v1(8342.5,7291.57) ; C262.2@8460,1240 v2@8460,1200.63 ; v2(8468.74,1161.26) 8514.78,1161.26 8530,1146.04 C226.2@8530,1120 ; v2(8468.74,1200.63) v2@8460,1200.63 ; v2(8468.74,1318.74) 8468.74,1367.24 8474,1372.5 8510,1372.5 C229.2@8510,1380 C232.2@8570,1380 ; C275.2@8530,1060 C226.2@8530,1120 ; R2107.2@8610,1810 8610,1815 8649.28,1815 v1(8658.45,1824.16) ; C291.2@8620,1240 C295.2@8620,1180 8620,1172.5 8567.5,1120 C226.2@8530,1120 ; C228.2@8630,810 8630,768.37 v1(8636.97,761.4) ; v1(8632.14,7346.91) 8683.09,7346.91 R1724.1@8690,7340 ; C260.2@8650,1680 8690.78,1680 v1(8691.03,1680.25) ; R1835.1@8650,4650 v1(8695.09,4650) ; v1(8662.71,4220.46) 8682.25,4240 C1168.1@8720,4240 R2657.2@8780,4240 ; v1(8686.71,7030) 8716.71,7000 R2600.2@8750,7000 ; v2(8704.96,1554.96) 8729.92,1530 C230.2@8780,1530 ; v1(8709.84,4967.75) 8712.75,4967.75 8720,4975 R1827.1@8720,5010 ; R2655.2@8720,5630 C1166.1@8780,5630 8834.34,5630 v1(8842.42,5621.92) ; C539.2@8720,6220 R1938.2@8790,6220 8790,6272.83 v1(8764.54,6298.29) ; R1478.1@8730,1120 8730,1104.11 8765,1104.11 8773.72,1095.39 v1(8774.77,1095.39) ; C799.2@8750,6925 R2600.2@8750,7000 ; C403.2@8755,7070 8750,7065 R2600.2@8750,7000 ; v1(8785.71,4745) 8785.71,4796.31 8809.4,4820 R2658.2@8850,4820 C1169.1@8910,4820 ; v1(8809.62,345.65) 8817.12,338.15 8817.12,288.5 Q110.2@8822.5,288.5 ; C1138.2@8820,7715 8820,7763.98 v1(8827.1,7771.08) ; v1(8824.38,6021.45) 8825.43,6022.5 8870,6022.5 C966.2@8870,6030 8906,6030 8940.31,5995.69 8940.31,5851.81 8962.12,5830 R1839.1@9010,5830 ; C264.2@8830,1010 v1(8881.43,1010) ; R2274.1@8830,7200 8889.96,7200 v1(8898.34,7208.38) 8909.48,7208.38 8970,7268.9 C1120.1@8970,7320 8977.5,7320 8997.5,7300 R2553.2@9040,7300 ; Q147.2@8842.5,5198.5 8842.5,5168.89 v1(8881.72,5129.66) 8890.33,5129.66 8900,5120 R1414.2@8900,5080 ; R2106.2@8860,1680 8860,1718.42 v1(8862.65,1721.07) ; C341.2@8880,2410 v1(8938.79,2410) C342.2@8990,2410 ; v1(8890,3411.74) R1417.2@8890,3490 ; R2656.2@8940,5630 C1167.1@9000,5630 9036,5630 9042.33,5636.33 v1(9042.33,5650.65) ; Q128.2@8952.5,3998.5 8952.5,3951.28 8967.9,3935.88 v1(9076.5,3935.88) ; v1(8976.97,4700) 8984,4700 Q129.2@9022.5,4738.5 ; Q149.2@9022.5,5198.5 9024.03,5198.5 9024.03,5174.27 v1(9052.87,5145.43) ; v1(9064.48,4534.5) 9119.98,4590 R2209.1@9150,4590 ; Q186.2@9077.5,7541.5 9078.76,7541.5 9078.76,7498 v1(9086.44,7490.32) ; v1(9111,4314.11) 9126.89,4330 R2208.1@9170,4330 ; R2218.1@9120,5000 9167.63,5000 v1(9167.78,5000.15) ; R2105.2@9230,1500 9230,1501 9259.94,1530.94 v1(9310.44,1530.94) ; 9240,340.86 C298.2@9240,420 ; R1833.1@9240,4530 v1(9303.39,4530) ; R2663.2@9290,4220 C1165.1@9350,4220 v1(9401.52,4220) ; v1(9310.06,5090) R1837.1@9360,5090 ; R2661.2@9420,5690 C1162.1@9480,5690 v1(9524.5,5690) R2662.2@9570,5690 C1163.1@9630,5690 ; v1(9445.45,5909.44) 9445.45,5876.39 9501.84,5820 C1000.2@9590,5820 ; v1(9468.5,4879.21) 9493.25,4854.46 9506.54,4854.46 Q145.2@9582.5,4778.5 ; R1412.2@9480,3650 9525.57,3650 9549.04,3673.48 v1(9549.04,3760.04) ; Q143.2@9502.5,3998.5 9502.5,3873.83 v1(9538.62,3837.72) 9538.62,3833.35 9561.97,3810 R2216.1@9600,3810 ; C1177.2@9510,7525 9576,7525 Q68.2@9582.5,7518.5 9582.5,7472.71 v1(9598.21,7457) ; Q139.2@9522.5,5198.5 9522.5,5155 9524.43,5155 9531.76,5147.67 v1(9531.76,5138.5) 9498.5,5138.5 9490,5130 R2279.2@9490,5090 R2214.1@9560,5090 ; v1(9554.59,4504.91) 9582.64,4476.86 9610,4476.86 R1413.2@9610,4480 ; C1164.1@9580,4630 R2664.2@9640,4630 v1(9686.5,4630) ; v1(9594.55,7089.79) 9600,7095.24 R1369.1@9600,7140 ; C413.1@9610,7300 9626.73,7300 9663.82,7262.9 v1(9663.82,7232.07) ; v1(9668.28,7760) R1383.1@9720,7760 ; 9674.03,380 C308.2@9740,380 ; R2280.2@9690,5270 9690,5224.03 v1(9699.11,5214.92) ; Q141.2@9752.5,5648.5 9752.5,5600.3 v1(9760,5592.8) ; v1(9785.75,7228.45) 9794.19,7220 C407.1@9840,7220 ; C1100.2@9870,1650 9871.5,1650 9876.67,1644.83 9876.67,1649.55 10038.22,1649.55 10038.22,1644.83 10083.39,1599.67 v1(10083.39,1476.53) ; v1(9880.82,6408.84) 9941.16,6408.84 TP1673.1@9960,6390 ; Q3.2@9887.5,6031.5 9898.98,6042.98 v1(9938.61,6042.98) ; R2666.2@9910,5700 9947.57,5700 ; Q43.2@9912.5,7128.5 9912.5,7107.75 9938,7082.25 9976.44,7082.25 v1(9987.5,7071.19) ; v1(9931.23,4670.01) 9944,4682.78 9944,4683.28 9956.16,4695.44 10041.74,4695.44 10050,4687.19 R1420.2@10050,4660 ; v1(9939.2,3770) R2278.2@9990,3770 ; R1387.1@9940,7760 v1(10006.3,7760) ; v1(9947.57,5748.94) 9947.57,5700 ; C1171.1@9970,5700 9947.57,5700 ; v1(9976.64,4500.19) 9978.8,4500.19 9978.8,4513.01 9980,4513.01 R1832.1@9980,4600 ; R2277.2@9990,5120 9990,5160.34 v1(9982.92,5167.42) 9982.92,5168.92 10002.5,5188.5 Q133.2@10042.5,5188.5 ; R2659.2@10010,4310 C1172.1@10070,4310 ; C1160.1@10030,6260 R2653.2@10100,6260 v1(10153.44,6260) ; C411.1@10060,7220 10099.86,7220 v1(10105.96,7226.11) ; R2660.2@10070,4840 C1173.1@10130,4840 10130,4881.54 v1(10143.85,4895.39) ; v1(10070,4983.83) R2211.1@10070,5040 ; Q239.3@10090,5658.5 10090,5614.38 v1(10098.1,5606.28) ; R1831.1@10110,4410 10110,4409.27 10071.62,4409.27 10054.81,4392.46 10054.81,4353.52 v1(10055.51,4353.52) 10070,4339.03 C1172.1@10070,4310 ; v1(10122.5,7077.27) Q47.2@10122.5,7128.5 ; Q135.2@10152.5,4018.5 10152.5,3870.07 10206.64,3815.93 v1(10206.64,3794.89) ; R2212.1@10160,4310 C1172.1@10070,4310 ; R1367.1@10180,6900 10230.03,6900 v1(10235.99,6894.04) ; v1(10192.18,4716.07) 10193.57,4716.07 10202.5,4725 Q137.2@10202.5,4768.5 ; v1(10212.5,5132.59) Q131.2@10212.5,5188.5 ; v1(10231.43,5900.65) 10253.35,5900.65 10254,5900 R2512.2@10290,5900 ; Q238.3@10280,5648.5 10339.18,5648.5 v1(10346.41,5641.27) ; C406.1@10280,7220 10323.96,7220 v1(10331.94,7227.98) 10331.94,7179.97 10352.5,7159.41 Q42.2@10352.5,7128.5 ; v1(10280,7491.4) C1103.2@10280,7550 ; v1(10309.43,1423.57) 10309.43,1473.23 10330,1493.81 C309.2@10330,1650 ; v1(10348.32,6900) R1362.1@10400,6900 ; v1(10508.39,1180.29) 10510,1178.67 R964.1@10510,1130 ; v1(10510,7419.4) 10510,7425.59 10560.07,7475.66 10560.07,7547.61 10520,7587.68 R1382.1@10520,7660
  other v1: 9747.5,138.28 9066.76,144.88 9746.92,203.14 9066.19,209.74 9749.22,272.02 9068.48,278.62 10073.45,853.1 10124.58,854.01 5685,1008.67 5087.21,1125 10033.4,1474.04 5170,1644.81 5101.58,1715 6775,2434.09 7411.22,2813.3 3277.34,3074.19 3322.92,3074.19 4778.2,4110.66 6107.23,4221.2 6156.27,4223.01 4782.65,4247.43 9384.12,6365.05 9436.86,6366.39 10369.42,6566.58 10321.4,6569.68 4089.31,7622.76 5778.64,7769.98
HW_RESET: J2.47 Q114.3 R2285.2 TP535.1 | length 685.6
  Top Layer w10: R2285.2@570,7760 570,7794.43 580.43,7804.86 675.44,7804.86 718.8,7761.5 Q114.3@750,7761.5 785,7761.5 952.36,7928.86 952.36,8031.5 971.18,8050.32
  Top Layer w20: 971.18,8050.32 J2.47@1002.36,8081.5
  Bottom Layer w10: TP535.1@1000,8080 1000,8081.5 J2.47@1002.36,8081.5
I+_CHG: J1.33 R2271.1 TP536.1 | length 2256.7
  Top Layer w10: J1.33@8131.5,8081.5 8082.26,8032.26 8082.26,7950.07 8106.1,7926.23 8157.97,7926.23 8274.44,7809.76 8470.95,7809.76 8647.13,7633.58 8647.13,7404.33 8598.62,7355.81 8598.62,7199.92 8612.86,7185.67 8612.86,6987.34 8635.35,6964.85 8635.35,6713.69 8595,6673.34 8595,6354.4 8570,6329.4 R2271.1@8570,6290
  Bottom Layer w10: TP536.1@8130,8080 8130,8081.5 J1.33@8131.5,8081.5
I+_CHGF: C766.2 R1398.2 TP294.1 U20.12 | length 2881.6
  Top Layer w10: U20.12@7295,3440 7295,3490 7312.95,3507.95 7362.95,3507.95 7415,3560 7482.71,3560 7543.48,3620.77 v1(7543.48,3654.18) ; v1(8194.58,3987.25) 8194.58,4035.3 8318.84,4159.56 8318.84,4163.62 8336.41,4181.2 8340.47,4181.2 8387.12,4227.85 8387.12,4496.96 8329.84,4554.24 8329.84,4752.25 8350,4772.41 R1398.2@8350,5420 8265,5420 C766.2@8250,5435
  Bottom Layer w10: v1(7543.48,3654.18) 7623.92,3654.18 7637.58,3667.85 7797.35,3667.85 7799.5,3670 7799.83,3670 7814.83,3685 TP294.1@7865,3685 7983.31,3685 8194.58,3896.27 v1(8194.58,3987.25)
I+chg_P: C349.1 R1196.1 R2229.2 R2272.1 TP295.1 U209.1 | length 631
  Top Layer w10: v1(8441.63,6081.75) 8446.75,6081.75 8465,6100 U209.1@8465,6150
  Bottom Layer w10: TP295.1@8095,5965 8095,5960 C349.1@8180,5960 R2229.2@8280,5960 ; R2272.1@8280,5840 R2229.2@8280,5950 R2229.2@8280,5960 ; v1(8441.63,6081.75) 8432.9,6081.75 8400,6048.85 R1196.1@8400,6020 8360.11,6020 8345.24,6005.12 8345.24,5986.14 8319.1,5960 R2229.2@8280,5960
I-_CHG: J1.34 R2264.1 TP539.1 | length 1039.1
  Top Layer w10: J1.34@8131.5,7981.5 8283.22,7829.77 8480.97,7829.77 8668.49,7642.24 8668.49,7371.51 8710,7330 R2264.1@8710,7300
  Bottom Layer w10: TP539.1@8130,7980 J1.34@8131.5,7981.5
I-_CHGF: C767.2 R1399.2 TP375.1 U20.15 | length 4428.8
  Top Layer w10: U20.15@7445,3440 7445,3477.19 7457.81,3490 7487.61,3490 7597.96,3600.35 7597.96,3623.77 v1(7598.59,3623.77) ; v1(8442.26,4091.14) 8442.26,4095.15 8412.26,4095.15 8397.42,4109.98 8397.42,4169.42 8427.58,4199.57 8427.58,5687.83 8599.35,5859.61 8757.77,5859.61 8797.79,5899.63 8855.03,5899.63 8857.71,5896.95 8900.6,5896.95 8917.5,5913.85 8917.5,6593.6 8886.1,6625 C767.2@8820,6625 8810,6625 R1399.2@8810,6710
  Bottom Layer w10: v1(7598.59,3623.77) 7601.19,3626.38 7624.4,3626.38 7645.87,3647.85 7805.63,3647.85 7807.79,3650 8012.12,3650 8318.57,3956.44 8318.57,3973.57 TP375.1@8320,3975 8432.17,4087.17 8438.28,4087.17 v1(8442.26,4091.14)
I-chg_P: C350.1 R1197.1 R2273.1 R2275.2 TP538.1 U210.1 | length 1259.1
  Top Layer w10: R1197.1@8650,6430 8629.3,6430 8615,6444.3 8615,6663.02 8655.55,6703.57 8655.55,6955.63 8720.18,7020.27 8815.27,7020.27 8835,7040 U210.1@8835,7090 8835,7125.5 8839.5,7130 8901.9,7130 R2273.1@8910,7130 8930.63,7150.63 v1(8930.63,7172.87) 8923.99,7172.87 8867.13,7172.87 R2275.2@8850,7190 8850,7260 C350.1@8840,7260
  Bottom Layer w10: v1(8930.63,7172.87) 8970,7133.5 TP538.1@8970,7095
IBAT+_CHG: R1213.1 R1449.1 TP373.1 U209.6 U209.7 | length 4061.1
  Top Layer w10: v1(6710.4,4059.8) 6710.4,4029.8 6724.31,4015.89 R1213.1@6724.31,3849.09 ; v1(8348.84,4151.2) 8407.47,4209.82 8407.47,4505.31 8349.84,4562.93 8349.84,4743.97 8387.5,4781.63 8387.5,5655 R1449.1@8352.5,5690 ; R1449.1@8350,5690 R1449.1@8352.5,5690 ; U209.6@8365,5950 8365,5995.65 8377.2,6007.85 8400.23,6007.85 8415,5993.08 U209.7@8415,5950 8415,5900 8401.91,5886.91 8401.91,5739.41 R1449.1@8352.5,5690
  Bottom Layer w10: v1(6710.4,4059.8) 6740.4,4059.8 6750.1,4050.1 6976.01,4050.1 7090.41,3935.71 7213.22,3935.71 7255.35,3977.84 7578.81,3977.84 7639.25,4038.28 7704.85,4038.28 7717.58,4051.01 7845.87,4051.01 7916.51,4121.64 7965,4121.64 TP373.1@7965,4130 8000,4130 8006.42,4123.58 8321.22,4123.58 v1(8348.84,4151.2)
IBAT-_CHG: R1216.1 R1450.1 TP372.1 U210.6 U210.7 | length 5953.5
  Top Layer w10: R1216.1@6320,3840 v1(6382.39,3840) ; v1(8427.42,4156.99) 8427.42,4166.53 8443.87,4182.97 8443.87,4184.43 8447.65,4188.21 8447.65,5679.62 8607.64,5839.61 8766.57,5839.61 8806.14,5879.18 8847.2,5879.18 8850.64,5875.74 8907.67,5875.74 8941,5909.07 8941,6825.25 8870.25,6896 8870.25,6933.9 8851.94,6952.2 8785,6952.2 ; R1450.1@8700,6800 8700,6817.15 8735,6852.15 U210.6@8735,6890 8735,6938.93 8748.57,6952.51 8785,6952.51 8785,6952.2 ; U210.7@8785,6890 8785,6952.2
  Bottom Layer w10: v1(6382.39,3840) 6458.05,3840 6507.14,3889.09 6880.83,3889.09 6932.04,3837.88 6932.25,3837.88 6959.86,3810.27 7033.42,3810.27 7077.51,3766.17 7123.37,3766.17 7172.91,3815.71 7677.95,3815.71 7719.74,3857.5 7752.94,3857.5 7798.03,3812.41 8005.01,3812.41 8100.4,3907.8 8100.4,3965.4 TP372.1@8105,3970 8138.58,4003.58 8138.58,4005.34 8208.78,4075.55 8210.55,4075.55 8217.38,4082.38 8352.81,4082.38 v1(8427.42,4156.99)
IBUS_P: D188.1 D188.2 D190.1 D190.2 D192.1 D192.2 D216.3 D370.3 R2199.2 R2323.1 TP540.1 | length 2502.9
  Top Layer w10: D188.1@2787.5,3681.5 D188.2@2712.5,3681.5 D190.1@2712.5,3798.5 D190.2@2787.5,3798.5 D192.1@2862.5,3798.5 D192.2@2937.5,3798.5 2972.23,3798.5 3006.62,3832.9 v1(3006.62,3932.69) ; v1(3658.96,4347.6) 3663.7,4347.6 3699.04,4382.95 3805.7,4382.95 v1(3836.23,4413.48)
  Bottom Layer w10: v1(3006.62,3932.69) 3006.62,4017.31 3338.91,4349.59 3658.96,4349.59 v1(3658.96,4347.6) ; v1(3836.23,4413.48) 3894.3,4413.48 3909.55,4398.24 3950.38,4398.24 3967.96,4415.81 3967.96,4455.07 4014.77,4501.87 4093.87,4501.87 4113.5,4521.5 4154.62,4521.5 ; D216.3@4150,4618.5 4150,4526.12 4154.62,4521.5 ; TP540.1@4395,4605 4395,4560 4390,4555 R2199.2@4390,4520 R2323.1@4310,4520 4310,4521.5 D370.3@4190,4521.5 4154.62,4521.5
IINV_A: Q185.2 Q195.2 R1207.1 TP12.1 TP369.1 U51.6 U51.7 | length 4970
  Top Layer w10: v1(4725.8,4279.93) 4725.8,4271.12 4700.9,4246.22 4700.9,3982.36 4736.73,3946.53 4736.73,3825.39 4728.17,3816.83 4728.17,3710.63 4739.79,3699.01 v1(4739.79,3389.68) 4739.79,3357.25 4757.03,3340 R1207.1@4800,3340 ; U51.6@5055,6910 5055,6867.36 5061.13,6861.23 5105,6861.23 ; U51.7@5105,6910 5105,6861.23 ; TP12.1@5370,4250 5338.18,4281.82 5338.18,5178.69 5325.36,5191.51 5325.36,5229.75 5314.73,5240.38 5314.73,6177.5 5347.5,6210.27 5347.5,6784.5 5312.78,6819.22 5146.27,6819.22 5105,6860.49 5105,6861.23
  Bottom Layer w10: v1(4725.8,4279.93) 4725.8,4283.01 TP369.1@5066.29,4283.01 ; v1(4739.79,3389.68) 4739.79,3416.59 4751.7,3428.5 Q195.2@4782.5,3428.5 4782.5,3456.28 4793.22,3467 4907.5,3467 4942.5,3432 Q185.2@4942.5,3428.5 ; TP369.1@5070,4290 5066.29,4290 TP369.1@5066.29,4283.01 ; TP12.1@5370,4250 5370,4250.62 5098.68,4250.62 TP369.1@5066.29,4283.01
IINV_A/VINV_DC_A: R915.1 TP543.1 U230.6 U230.7 | length 493.5
  Top Layer w10: U230.6@4655,2890 v1@4655,2827.4 ; R915.1@4670,2600 4670,2644.14 4659.43,2654.71 4659.43,2781.23 4648.92,2791.73 v1(4648.92,2821.73) 4648.92,2827.4 v1@4655,2827.4 ; U230.7@4705,2890 4705,2841.56 4690.83,2827.4 v1@4655,2827.4
  Bottom Layer w10: v1(4648.92,2821.73) 4658.89,2831.7 4667.93,2831.7 4675,2838.77 TP543.1@4675,2890
IINV_B: Q183.2 Q193.2 R1209.1 TP544.1 U259.6 U259.7 | length 2683.2
  Top Layer w10: U259.6@5045,5950 5045,5906.24 5055.25,5896 5095,5896 ; R1209.1@5060,3820 5058.39,3820 5058.39,3834.85 v1(5129.5,3905.96) ; U259.7@5095,5950 5095,5896 ; v1(5189.5,3912.04) 5191.33,3912.04 5198.01,3918.71 5198.01,4107.12 5194.43,4110.7 5194.43,4281.61 5217.75,4304.93 5217.75,5064.08 5244.73,5091.06 5244.73,5482.63 v1(5230,5497.37) 5230,5576.56 5185,5621.56 5185,5690.29 5095,5780.29 5095,5896
  Bottom Layer w10: Q193.2@5047.5,3821.5 5062.5,3821.5 5062.5,3867.8 5100.65,3905.96 v1(5129.5,3905.96) 5187.14,3905.96 v1@5187.5,3905.6 ; Q183.2@5187.5,3821.5 v1@5187.5,3905.6 ; v1(5189.5,3912.04) 5189.5,3907.6 v1@5187.5,3905.6 ; v1(5230,5497.37) TP544.1@5230,5545
IINV_B/VINV_DC_B: R890.1 TP545.1 U229.1 U229.2 | length 892.1
  Top Layer w10: v1(4689.43,2667.14) 4734.03,2667.14 4909.75,2842.86 4909.75,2944.25 4957.06,2991.56 5006.56,2991.56 5042.75,3027.75 ; U229.2@5055,3090 5055,3040 5042.75,3027.75 ; U229.1@5105,3090 5105,3040.15 5088.9,3024.06 5054.52,3024.06 5051.05,3027.52 5042.98,3027.52 5042.75,3027.75
  Bottom Layer w10: R890.1@4610,2600 4610,2659.08 4615,2664.08 TP545.1@4615,2665 4657.29,2665 4659.43,2667.14 v1(4689.43,2667.14)
IINV_C: Q184.2 Q209.2 R1190.1 TP368.1 U53.6 U53.7 | length 3606.9
  Top Layer w10: v1(4545,4110) 4545,4108.71 v1@4551.8,4108.71 ; U53.6@4565,6910 4565,6858.46 ; U53.7@4615,6910 4615,6872.21 4600.12,6857.34 4565,6857.34 4565,6858.46 ; v1(4730.9,4089.52) 4730.9,3984.7 4796.38,3919.23 4796.38,3881.5 4857.87,3820 R1190.1@4870,3820 ; v1@4551.8,4108.71 4550.38,4110.13 4550.38,4149.32 4423.12,4276.57 4423.12,5492.25 4392.5,5522.87 Q184.2@4392.5,6041.5 Q209.2@4392.5,6231.5 4392.5,6270 4412.5,6290 4412.5,6756.16 4514.8,6858.46 4565,6858.46 ; v1@4551.8,4108.71 4553.37,4107.14 4553.37,4108.71 v1@4551.8,4108.71
  Bottom Layer w10: v1(4545,4110) 4545,4108.71 4553.37,4108.71 4553.37,4107.14 4712.17,4107.14 4729.79,4089.52 v1(4730.9,4089.52)
IINV_C/VINV_DC_C: R888.1 TP546.1 U229.6 U229.7 | length 635.8
  Top Layer w10: R888.1@4760,2600 4760,2630 4949.04,2819.04 v1(5045,2819.04) 5055.3,2829.35 5055.3,2839.7 5055,2840 5055,2840.34 ; U229.6@5005,2890 5005,2846.19 5010.84,2840.34 5055,2840.34 ; U229.7@5055,2890 5055,2840.34
  Bottom Layer w10: v1(5045,2819.04) TP546.1@5045,2890
IINV_L_AF: Q188.2 Q189.2 R1200.1 TP1578.1 U45.6 U45.7 | length 2842.6
  Top Layer w10: R1200.1@4490,3270 4494.78,3270 4494.78,3235 4504.13,3225.65 v1(4504.13,3220.61) ; v1(5402.14,3407.9) 5402.14,3437.9 5418.5,3454.26 5418.5,3841.09 5436.85,3859.44 5436.85,3956.63 5535,4054.78 5535,4376.49 ; U45.6@5535,4440 5535,4376.49 ; U45.7@5585,4440 5585,4396.26 5565.23,4376.49 5535,4376.49
  Bottom Layer w10: Q189.2@4287.5,3321.5 4300.01,3321.5 4344.19,3277.32 4487.5,3277.32 4487.5,3280.08 ; v1(4504.13,3220.61) 4507.18,3220.61 4507.18,3260.41 4487.5,3280.08 ; TP1578.1@5290,3430 TP1578.1@5295.85,3430 ; v1(5402.14,3407.9) 5398.83,3407.9 5398.83,3411.61 5314.24,3411.61 TP1578.1@5295.85,3430 ; 4487.5,3280.08 Q188.2@4487.5,3321.5 4487.5,3442.5 4534.84,3489.84 4722.85,3489.84 4785.69,3552.68 4847.9,3552.68 4854.34,3546.24 4915.76,3546.24 4991.44,3621.92 5118.8,3621.92 5176.99,3563.73 5248.19,3563.73 5272.66,3539.27 5272.66,3453.19 TP1578.1@5295.85,3430
IINV_L_BF: Q178.2 Q190.2 R1202.1 TP1579.1 U46.6 U46.7 | length 1898.6
  Top Layer w10: R1202.1@4640,3820 4676.36,3820 4686.73,3830.37 v1(4686.73,3884.17) 4686.73,3939.96 4655.6,3971.09 4655.6,4293.58 4677.36,4315.34 4721.38,4315.34 4761.65,4355.61 4761.65,4619.61 4965,4822.96 4965,4941.82 5018.5,4995.32 5018.5,5040 U46.6@5025,5040 5025,5082.55 5032.17,5089.72 5068.04,5089.72 5075,5082.76 U46.7@5075,5040
  Bottom Layer w10: Q178.2@4567.5,3811.5 4567.5,3843.53 4580.5,3856.53 4659.08,3856.53 v1(4686.73,3884.17) ; Q190.2@4707.5,3811.5 4707.5,3862.52 4686.73,3883.29 v1(4686.73,3884.17) ; TP1579.1@4730,3905 4729.03,3905 4710.23,3886.2 4688.76,3886.2 v1(4686.73,3884.17)
IINV_L_CF: Q179.2 Q191.2 R1204.1 TP554.1 U47.6 U47.7 | length 2803.5
  Top Layer w10: U47.6@4165,5950 4165,5909.58 4178.29,5896.29 4215,5896.29 4215,5900 ; v1(4227.85,6013) 4227.85,6012.85 4215,6000 U47.7@4215,5950 4215,5900 ; R1204.1@4430,3820 4432.5,3820 4479.82,3867.32 v1(4479.82,3881.46) 4482.5,3881.46 4482.5,4114.63 4383.12,4214.01 4383.12,5440.68 4316.21,5507.59 4316.21,5667.41 4244.19,5739.43 4244.19,5870.81 4215,5900
  Bottom Layer w10: TP554.1@4210,5940 4210,5995.15 v1(4227.85,6013) ; Q179.2@4287.5,3811.5 4287.5,3847.46 4290.04,3850 4427.5,3850 ; Q191.2@4427.5,3811.5 4427.5,3850 ; v1(4479.82,3881.46) 4444.08,3881.46 4427.5,3864.87 4427.5,3850
IINV_LU: J3.20 R1856.1 R2308.1 R2309.1 TP547.1 TP548.1 | length 3888.3
  Top Layer w10: 4989.65,7940.83 4888.69,7839.88 4649.14,7839.88 4630.36,7821.09 4630.36,7369.93 4847.76,7152.52 4847.76,6808.07 4875.84,6780 R2308.1@4910,6780 4966.25,6780 4976.25,6770 v1(5159.47,6770) R2309.1@5270,6770 5305.06,6770 5327.5,6747.56 5327.5,6218.77 5294.32,6185.59 5294.32,5248.16 5294.73,5247.75 v1(5294.73,5217.75) ; v1(5355.99,5206.15) 5377.7,5206.15 5390,5193.85 R1856.1@5390,5160
  Top Layer w20: 4989.65,7940.83 5014.96,7966.15 J3.20@5014.96,7981.5
  Bottom Layer w10: v1(5159.47,6770) TP548.1@5215,6770 ; TP547.1@5260,5150 5273.52,5163.52 5273.52,5196.53 v1(5294.73,5217.75) 5306.33,5206.15 v1(5355.99,5206.15)
IINV_LV: J3.22 R1857.1 R2300.1 R2301.1 TP549.1 | length 3021.3
  Top Layer w10: R2301.1@4560,6810 R2300.1@4630,6810 ; R1857.1@4910,5810 4868.7,5810 4852.77,5825.93 4852.77,6105.03 4828.02,6129.78 4828.02,6431.06 4826.04,6433.04 4826.04,6733.48 v1(4794.7,6764.83) 4787.1,6764.83 4777.42,6774.51 4642.67,6774.51 4630,6787.17 R2300.1@4630,6810 ; J3.22@4914.96,7981.5 4813.34,7879.88 4632.57,7879.88 4590.36,7837.66 4590.36,7353.36 4807.5,7136.21 4807.5,6827.81 4789.69,6810 R2300.1@4630,6810
  Bottom Layer w10: TP549.1@4740,6775 4743.28,6771.72 4787.81,6771.72 v1(4794.7,6764.83)
IINV_LW: J3.24 R1858.1 R2296.1 R2297.1 TP551.1 | length 1843
  Top Layer w10: R2297.1@4140,6810 R2296.1@4220,6810 4220,6812.19 v1@4297.37,6812.19 ; v1(4297.37,6816.56) v1@4297.37,6812.19 ; 4778.35,7944.89 4753.34,7919.88 4608.93,7919.88 4549.63,7860.57 4549.63,7550.85 4475.98,7477.2 4391.84,7477.2 4372.5,7457.86 4372.5,6840.17 4343.89,6811.56 4297.37,6811.56 v1@4297.37,6812.19
  Top Layer w20: 4778.35,7944.89 J3.24@4814.96,7981.5
  Bottom Layer w10: v1(4297.37,6816.56) 4297.37,6815.83 4303.11,6810.09 4303.11,6771.89 TP551.1@4310,6765 4326.48,6765 4341.48,6780 R1858.1@4380,6780
IINV_U: J3.19 R2266.1 TP555.1 | length 1560.9
  Top Layer w10: 5050.18,8046.28 5059.96,8036.5 5059.96,7948.66 4931.18,7819.88 4657.43,7819.88 4650.36,7812.81 4650.36,7381.2 4727.62,7303.94 5091.13,7303.94 5100,7295.07 R2266.1@5100,7280 R2266.1@5100,7270
  Top Layer w20: J3.19@5014.96,8081.5 5050.18,8046.28
  Bottom Layer w10: TP555.1@5015,8080 J3.19@5014.96,8081.5
IINV_V: J3.21 R2267.1 TP556.1 | length 2225.8
  Top Layer w10: R2267.1@4910,6300 4866.59,6300 4848.02,6318.57 4848.02,6480.7 4846.04,6482.68 4846.04,6765.72 4827.5,6784.26 4827.5,7144.5 4610.36,7361.64 4610.36,7829.38 4640.86,7859.88 4856.98,7859.88 4963.78,7966.68 4963.78,8032.68 J3.21@4914.96,8081.5
  Bottom Layer w10: TP556.1@4915,8080 J3.21@4914.96,8081.5
IINV_W: J3.23 R2265.1 TP557.1 | length 971.6
  Top Layer w10: R2265.1@4430,7430 4458.14,7430 4570.36,7542.21 4570.36,7853.02 4617.22,7899.88 4796.98,7899.88 4859.96,7962.86 4859.96,8036.5 4849.87,8046.59
  Top Layer w20: J3.23@4814.96,8081.5 4849.87,8046.59
  Bottom Layer w10: TP557.1@4815,8080 J3.23@4814.96,8081.5
IINVL_U_FOR_CMP: C1049.2 R1193.1 R1701.1 R2371.2 TP541.1 U41.1 | length 778.7
  Top Layer w10: U41.1@5145,6590 U41.1@5146.62,6590 ; C1049.2@5160,6670 5150.64,6670 5150.64,6590 U41.1@5146.62,6590 ; v1(5275.64,6299.72) 5307.5,6331.58 5307.5,6438.62 5296.12,6450 R1701.1@5270,6450 R2371.2@5270,6530 5164.98,6530 5146.62,6548.35 U41.1@5146.62,6590 ; R1193.1@5390,6300 v1(5390,6356.91)
  Bottom Layer w10: v1(5275.64,6299.72) 5387.99,6299.72 5390,6301.73 5391.73,6300 TP541.1@5395,6300 5395,6351.91 v1(5390,6356.91)
IINVL_V_FOR_CMP: C1048.2 R1194.1 R2299.1 R2372.2 TP542.1 U87.1 | length 620.7
  Top Layer w10: C1048.2@4670,6665 4665,6660 U87.1@4665,6590 4665,6540 4705,6500 v1(4712.77,6500) 4722.77,6510 R2372.2@4770,6510 R2299.1@4770,6430.85 ; R1194.1@4770,6260 4770,6263.47 4789.25,6263.47 4807.5,6281.72 4807.5,6423.29 4799.95,6430.85 R2299.1@4770,6430.85 ; R2299.1@4770,6430 R2299.1@4770,6430.85
  Bottom Layer w10: v1(4712.77,6500) TP542.1@4770,6500
IINVL_W_FOR_CMP: C1047.2 R1195.1 R2295.1 R2373.2 TP370.1 U89.1 | length 1008.6
  Top Layer w10: R2295.1@4040,5410 4042.5,5410 4052.89,5420.39 4111.98,5420.39 4162.57,5470.98 4265,5470.98 ; R2373.2@4200,5770 4200,5718.5 4258.5,5660 C1047.2@4260,5660 4260,5625 4265,5620 U89.1@4265,5570 4265,5470.98 ; v1(4349.71,5300) 4349.71,5429.23 4307.96,5470.98 4265,5470.98
  Bottom Layer w10: v1(4349.71,5300) 4440,5300 ; TP370.1@4440,5320 4440,5300 ; R1195.1@4530,5300 4440,5300
IL_A: R1201.1 TP15.1 TP1580.1 U41.6 U41.7 | length 4655.9
  Top Layer w10: v1(4194.68,3972.33) 4190.6,3972.33 4190.6,3827.82 4156.67,3793.89 4156.67,3307.8 4194.48,3270 R1201.1@4270,3270 ; U41.6@5045,6390 5045,6424.55 5052.32,6431.88 5095,6431.88 ; U41.7@5095,6390 5095,6431.88 ; v1(5293.48,3999.19) 5293.48,4029.19 5303.48,4039.19 5303.48,4189.32 5286.72,4206.08 5286.72,4690.12 5255.16,4721.68 5255.16,4804.59 5280,4829.43 TP15.1@5280,4930 5280.54,4930 5280.54,5080.82 5264.73,5096.63 5264.73,5425.57 5272.25,5433.08 5272.25,6244 5233.32,6282.93 5233.32,6341.73 5203.54,6371.51 5203.54,6402.11 5165.65,6440 5109.15,6440 5101.03,6431.88 5095,6431.88
  Bottom Layer w10: v1(4194.68,3972.33) 4194.68,3974.51 5136.63,3974.51 5157.12,3995 TP1580.1@5240,3995 5289.29,3995 v1(5293.48,3999.19)
IL_A/IL_AF: R916.1 TP558.1 U228.1 U228.2 | length 767.3
  Top Layer w10: U228.2@4345,3090 U228.2@4345,3066.5 ; R916.1@4360,2600 4360,2670.72 4218.5,2812.22 4218.5,2947.14 4281.36,3010 4331.27,3010 4331.27,3019.47 4339.47,3019.47 v1(4340,3020) 4340,3025.81 4322.89,3042.92 4322.89,3044.39 U228.2@4345,3066.5 ; U228.1@4395,3090 4395,3051.23 4385.07,3041.3 4345,3041.3 U228.2@4345,3066.5
IL_B: R1203.1 TP559.1 U87.6 U87.7 | length 2951.4
  Top Layer w10: R1203.1@4530,3820 4530,3860.47 4522.42,3868.05 4522.42,3882.63 4507.5,3897.55 4507.5,4021.21 4522.36,4036.07 4555.5,4036.07 4583.7,4064.27 4583.7,4146.11 4444.69,4285.13 4444.69,5511.04 4432.86,5522.87 4432.86,5787.51 4565,5919.65 4565,6290.53 4564.39,6291.13 v1@4564.39,6321.13 ; v1(4561.58,6329.74) 4564.39,6329.74 v1@4564.39,6321.13 ; U87.6@4565,6390 4565,6344.41 ; U87.7@4615,6390 4615,6355.38 4604.03,6344.41 4565,6344.41 ; v1@4564.39,6321.13 4565,6321.13 4565,6344.41
  Bottom Layer w10: v1(4561.58,6329.74) 4564.39,6329.74 4564.39,6321.13 4565,6320.53 4615,6370.53 TP559.1@4615,6390
IL_B/IL_BF: R920.1 TP560.1 U228.6 U228.7 | length 541.5
  Top Layer w10: U228.6@4295,2890 4295,2842.87 ; U228.7@4345,2890 4345,2851.08 4336.79,2842.87 4295,2842.87 ; R920.1@4460,2600 4460,2707.56 4345.21,2822.35 v1(4302.06,2822.35) 4302.06,2832.94 4295,2840 4295,2842.87
  Bottom Layer w10: TP560.1@4295,2885 4295,2829.42 v1(4302.06,2822.35)
IL_C: R1205.1 TP561.1 U89.6 U89.7 | length 1976
  Top Layer w10: U89.6@4165,5370 4165,5419.66 ; v1(4175,5440.98) 4175,5430 4165,5420 4165,5419.66 ; U89.7@4215,5370 4215,5411.74 ; R1205.1@4320,3820 4320,3860.29 4309.33,3870.96 4309.33,4084.31 4361.84,4136.82 4361.84,5236.43 4315.28,5282.99 4315.28,5387.43 4282.71,5420 4215,5420 4215,5411.74 ; 4165,5419.66 4207.09,5419.66 4215,5411.74
  Bottom Layer w10: TP561.1@4175,5370 v1(4175,5440.98)
IL_C/IL_CF: R918.1 TP562.1 U230.1 U230.2 | length 708.5
  Top Layer w10: v1(4520,2659.3) 4520,2692.04 4546.54,2718.58 4546.54,2921.85 4592.31,2967.62 4642.74,2967.62 4702.74,3027.62 v1@4710,3027.62 ; U230.2@4705,3090 4705,3040 4715,3030 v1@4715,3027.62 ; v1(4710,3025) v1@4710,3027.62 ; U230.1@4755,3090 4755,3041.47 4741.16,3027.62 v1@4715,3027.62 ; v1@4710,3027.62 v1@4715,3027.62
  Bottom Layer w10: R918.1@4520,2600 v1(4520,2659.3)
INV_485_RXD: R634.2 TP221.1 U6.T8 U29.1 | length 2041.5
  Top Layer w6: 1928.09,1423.05 1930.94,1420.2 2024.72,1420.2 U6.T8@2024.72,1419.68
  Top Layer w10: R634.2@501.63,1984.11 501.63,2018.67 496.72,2023.58 v1(496.72,2053.58) 523.4,2053.58 536.5,2066.68 536.5,2104.11 U29.1@536.63,2104.11 ; v1(1570.21,1645.62) 1575.93,1645.62 1579.29,1642.25 1670.73,1642.25 1889.93,1423.05 1915,1423.05 1928.09,1423.05
  Bottom Layer w10: v1(496.72,2053.58) 527.91,2022.38 527.91,1990 TP221.1@530,1990 531.2,1991.2 543.64,1978.76 771.25,1978.76 1196.58,1553.44 1385.42,1553.44 1427.04,1595.05 1519.64,1595.05 v1(1570.21,1645.62)
INV_485_TXD: R991.1 R992.1 TP220.1 U6.R8 U29.3 | length 2032.2
  Top Layer w6: 1974.88,1440.06 2043.72,1440.06 U6.R8@2064.09,1419.68
  Top Layer w10: R991.1@571.63,1984.11 R992.1@641.63,1984.11 641.63,2025.56 v1(628.52,2038.67) 636.63,2046.77 U29.3@636.63,2104.11 ; v1(1503.58,1676.34) 1664.93,1676.34 1897.82,1443.45 1915,1443.45 1935.98,1443.45 1938.44,1440.99 1973.95,1440.99 1974.88,1440.06
  Bottom Layer w10: v1(628.52,2038.67) 628.52,2055.29 651.33,2078.1 722.24,2078.1 745,2055.34 TP220.1@745,2040 745,2033.35 1204.92,1573.44 1377.14,1573.44 1418.76,1615.05 1443.81,1615.05 1482.37,1653.61 1482.37,1655.13 v1(1503.58,1676.34)
INV_AD_ADJ1: TP386.1 U6.D1 U14.11 | length 2534.4
  Top Layer w10: U6.D1@2497.17,1695.28 2497.17,1735.9 2497.69,1736.42 2497.68,1744.05 v1(2525.11,1771.47) ; v1(3071.14,3001.86) 3367.46,3001.86 3404.29,3038.68 3404.29,3370.94 3392.57,3382.66 3192.07,3382.66 3185,3389.73 U14.11@3185,3440
  Bottom Layer w10: v1(2525.11,1771.47) 2559,1805.36 2559,1843.71 2640.29,1925 TP386.1@2695,1925 2934.82,2164.82 2934.82,2219.82 3071.14,2356.14 v1(3071.14,3001.86)
INV_AD_ADJ2: TP385.1 U6.E1 U14.10 | length 2582.3
  Top Layer w10: v1(2447.68,1757.13) 2447.68,1743.9 2457.8,1733.79 U6.E1@2457.8,1695.28 ; v1(3007.7,2985.51) 3056.05,3033.86 3367.68,3033.86 3384.05,3050.23 3384.05,3348.35 3369.75,3362.66 3162.34,3362.66 3135,3390 U14.10@3135,3440
  Bottom Layer w10: v1(2447.68,1757.13) 2470.25,1779.69 2470.25,1780.25 TP385.1@2495,1805 2539,1849 2539,1852 2685.18,1998.17 2737.95,1998.17 2914.44,2174.66 2914.44,2230.8 3016.7,2333.06 3016.7,2946.51 3007.7,2955.51 v1(3007.7,2985.51)
INV_AD_CS: R683.2 R1064.2 R1272.1 R1668.1 TP384.1 | length 1783.3
  Top Layer w10: R1064.2@2690,2530 R683.2@2690,2610 2710.66,2610 2721,2620.34 2721,2767.18 2698.92,2789.25 v1(2698.92,3107.1) ; v1(3684.53,3204.72) 3680,3209.24 R1668.1@3680,3250 R1272.1@3760,3250
  Bottom Layer w10: v1(2698.92,3107.1) 2698.92,3137.76 2731.16,3170 TP384.1@2855,3170 2855,3171.58 2855.28,3171.86 2964.3,3171.86 2991.61,3199.18 3678.99,3199.18 v1(3684.53,3204.72)